# Altium PCB LineFollower.PcbDoc
Units mm, origin at the board's own origin, x right, y up, seen from the top; angles counter-clockwise.
Board outline 60 x 102.04 mm, 2 copper layers (Top Layer, Bottom Layer), stack 1.271 mm thick; 37 components, 52 nets, 179 pads, 44 vias.
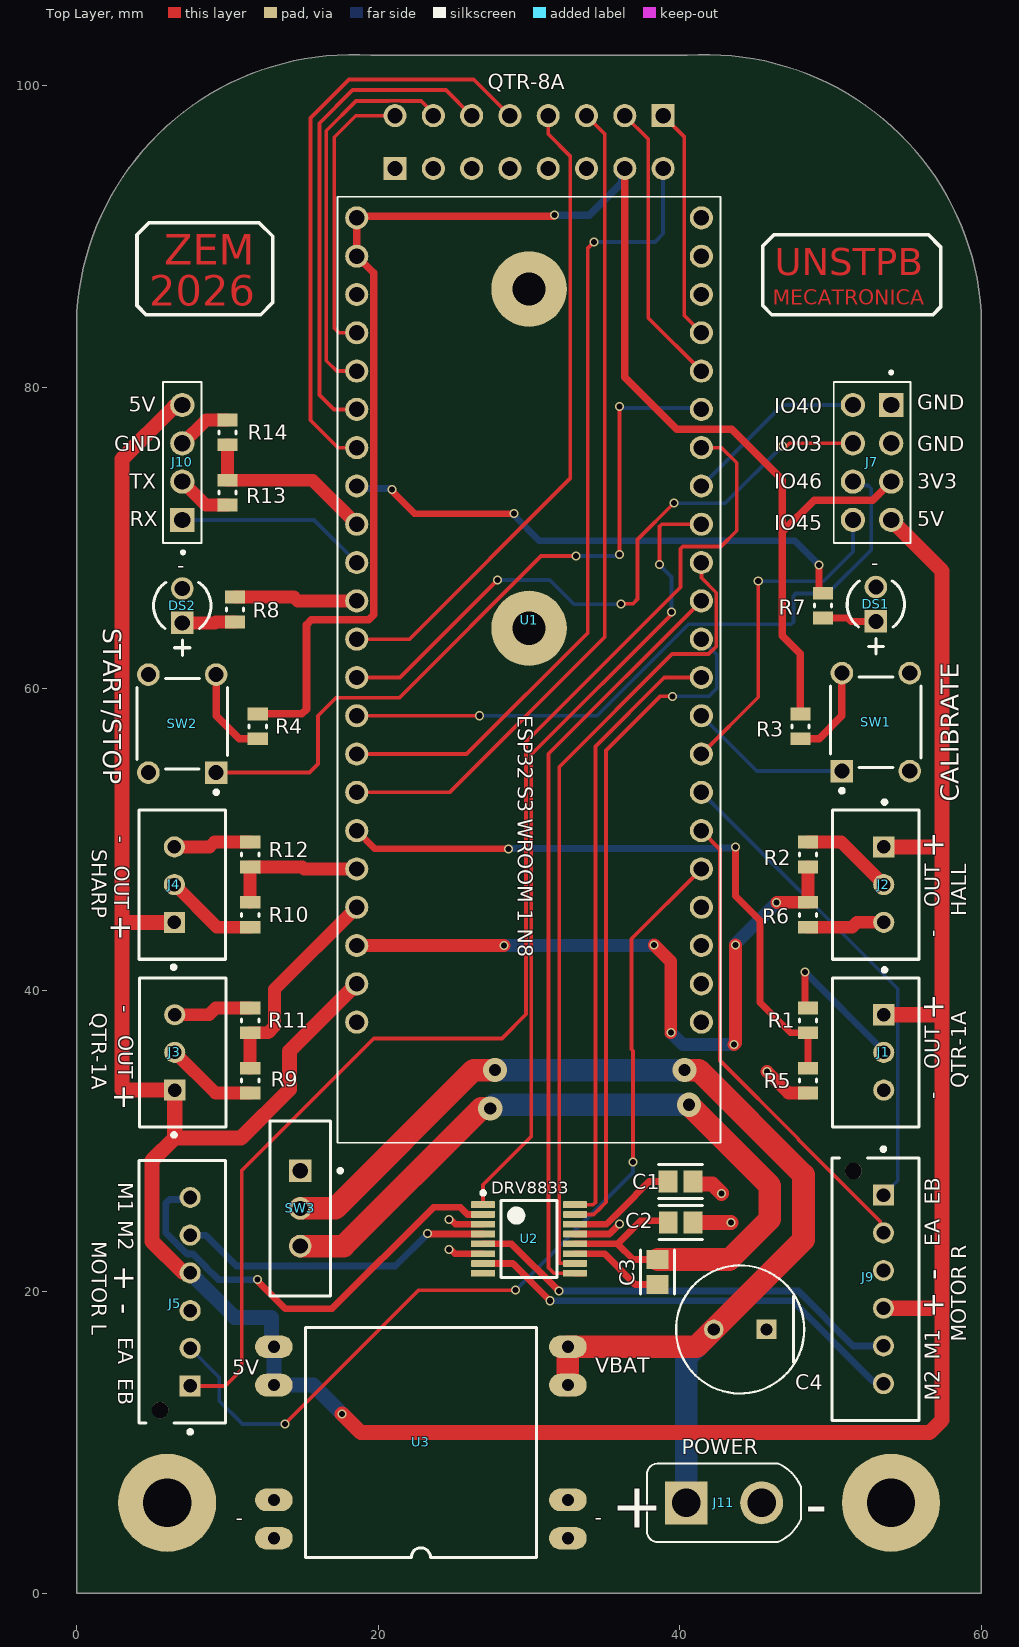
[diagram p0: Top Layer view]
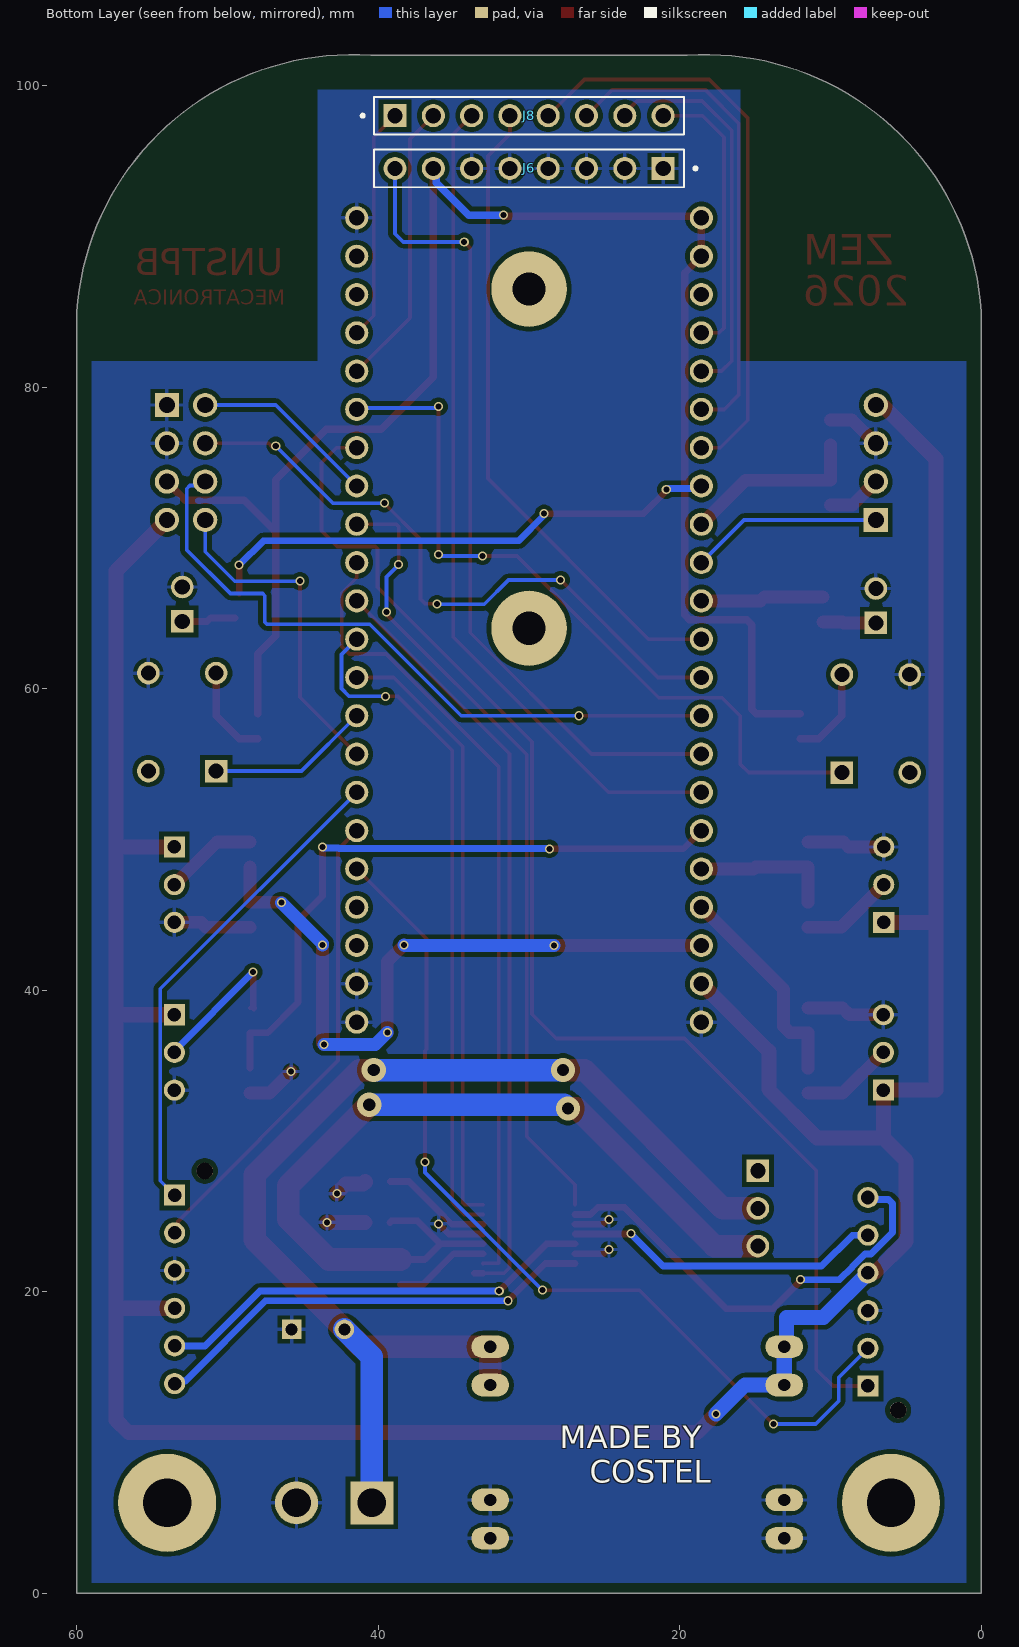
[diagram p1: Bottom Layer view, seen from below]

## Layer stack, top to bottom
Top Solder: solder mask 0.0102, Solder Resist, Dk 3.5
Top Layer: signal copper 0.0356
Dielectric 1: dielectric 1.2, FR-4, Dk 4.8
Bottom Layer: signal copper 0.0356
Bottom Solder: solder mask 0.0102, Solder Resist, Dk 3.5

## Board outline
0,0 0,85 cw(c18.25,83.75) 19.5,102 40.5,102 cw(c41.75,83.75) 60,85 60,0

## Design rules (kind name [scope] priority, off if disabled: settings)
Clearance Clearance_1 [InNamedPolygon('GND_L02_P001')] p1: gap=0.3 ignorepadtopadclearanceinfootprint=FALSE
Clearance [All] p2: gap=0.1 ignorepadtopadclearanceinfootprint=TRUE
HoleSize [All] p1: absolutevalues=TRUE maxlimit=6.5 minlimit=0.025 maxpercent=80.000 minpercent=20.000
MinimumSolderMaskSliver [All] p1: minsoldermaskwidth=0.05
PolygonConnect [All] p1: connectstyle=Relief reliefconductorwidth=0.254 reliefentries=4 polygonreliefangle="90 Angle" airgapwidth=0.254
RoutingVias [All] p1: holewidth=0.4 width=0.8 viastyle="Through Hole" minholewidth=0.2 minwidth=0.6 maxholewidth=0.8 maxwidth=0.8
SilkToSilkClearance [All] p1: silktosilkclearance=0.05
SilkToSolderMaskClearance [IsPad] p1: minsilkscreentomaskgap=0.05 clearancetoexposedcopper=TRUE
SolderMaskExpansion [All] p1: expansion=0.102 istentingtop=FALSE
SupplyNets "Schematic Supply Nets_3" [InNet('3V3')] p1: voltage=0.000
SupplyNets "Schematic Supply Nets_2" [InNet('GND')] p2: voltage=0.000
SupplyNets "Schematic Supply Nets_1" [InNet('VBAT')] p3: voltage=0.000
SupplyNets "Schematic Supply Nets" [InNet('VCC')] p4: voltage=0.000
Width VBAT [InNet('VBAT')] p1: maxlimit=2 minlimit=0.3 preferedwidth=2
Width GND [InNet('GND')] p2: maxlimit=2 minlimit=0.3 preferedwidth=2
Width 3V3 [InNet('3V3')] p3: maxlimit=0.5 minlimit=0.5 preferedwidth=0.5
Width VCC [InNet('GND')] p4: maxlimit=1 minlimit=0.8 preferedwidth=1
Width [All] p5: maxlimit=1.5 minlimit=0.2 preferedwidth=0.25
26 further rules are at their usual default settings.

## Components (designator, comment, footprint, x,y, rotation, side; value= is the part's Value field where it differs from the comment)
C1 "2.2uF 10V" FP-CL21-IPC_B 40.039,27.308 r0 top
C2 "10uF 25V" FP-CL21-IPC_B 40.055,24.598 r180 top
C3 "0.01uF 25V" FP-CL21-IPC_B 38.53,21.312 r90 top
C4 "EEUTA1E101" FP-RAD-TH-D_8_0_5-L_11_5-MFG 44,17.5 r180 top
DS1 "304090040" LED-2P-2.28-3MM 53,65.598 r90 top
DS2 "304090040" LED-2P-2.28-3MM 7,65.5 r90 top
J1 "B3B-XH-A" FP-B3B-XH-A_LF_SN-MFG 53,35.871 r270 top
J2 "B3B-XH-A" FP-B3B-XH-A_LF_SN-MFG 53,47 r270 top
J3 "B3B-XH-A" FP-B3B-XH-A_LF_SN-MFG 7.025,35.871 r90 top
J4 "B3B-XH-A" FP-B3B-XH-A_LF_SN-MFG 7,47 r90 top
J5 "B6B-XH-AM" FP-B6B-XH-AM_LF_SN-MFG#1 7,20 r270 top
J6 "HEADER 8PIN 2.54" GRAVITECH_8FX1-254MM 30,94.5 r0 bottom
J7 "HEADER 8PIN 2.54" SULLINS_PPPC042LFBN-RC 52.75,75 r90 top
J8 "HEADER 8PIN 2.54" GRAVITECH_8FX1-254MM 30,98 r180 bottom
J9 "B6B-XH-AM" FP-B6B-XH-AM_LF_SN-MFG#2 52.981,20.155 r90 top
J10 "HEADER 4PIN 2.54" SULLINS_PPTC041LFBN-RC 7,75 r90 top
J11 "XT30UPB-M" AMASS_XT30UPB-M 37.591,3.206 r0 top
R1 "1KR" RESC2013X60X30LL20T20 48.5,38 r90 top
R2 "1KR" RESC2013X60X30LL20T20 48.5,49 r90 top
R3 "10KR" RESC2013X60X30LL20T20 48,57.5 r90 top
R4 "10KR" RESC2013X60X30LL20T20 12,57.5 r90 top
R5 "2KR" RESC2013X60X30LL20T20 48.5,34 r90 top
R6 "2KR" RESC2013X60X30LL20T20 48.5,45 r90 top
R7 "330R" RESC2013X60X30LL20T20 49.5,65.5 r90 top
R8 "330R" RESC2013X60X30LL20T20 10.5,65.25 r90 top
R9 "1KR" RESC2013X60X30LL20T20 11.5,34 r270 top
R10 "1KR" RESC2013X60X30LL20T20 11.5,45 r270 top
R11 "2KR" RESC2013X60X30LL20T20 11.5,38 r270 top
R12 "2KR" RESC2013X60X30LL20T20 11.5,49 r270 top
R13 "1KR" RESC2013X60X30LL20T20 10,73 r270 top
R14 "2KR" RESC2013X60X30LL20T20 10,77 r270 top
SW1 "B3F-1000" OMRON-B3F-1000-4_V#1 53,57.779 r90 top
SW2 "B3F-1000" OMRON-B3F-1000-4_V#2 7,57.681 r90 top
SW3 "EG1218" ESWI-EG1218_V 14.825,25.525 r270 top
U1 "ESP32-S3-DEVKITC-1U-N8" MODULE_ESP32-S3-DEVKITC-1U-N8R8 30,61.25 r0 top locked
U2 "DRV8833PW" PW0016A_M 30,23.5 r0 top
U3 "MP1584" MP1584 32.575,3.65 r180 top

## Footprints (in the part's own frame and the unit in brackets; to place one, negate y for a bottom-side part, rotate by r counter-clockwise, add the part's x,y. Pads: shape width x height; smd on the part's side, far side on the other; paste and mask are expansions set on the pad)
AMASS_XT30UPB-M [mm]
  round 2.85 hole 1.9 mask+0.102: N(7.834,2.794)
  rect 2.85x2.85 / inner round 2.85 / far side rect 2.85x2.85 hole 1.9 mask+0.102: P(2.834,2.794)
  silkscreen extent 0.23,0.19 10.44,5.4, body extent 0.23,0.19 10.43,5.39, height 10.7
ESWI-EG1218_V [mm] "THD, 3-Leads, Body 11.6x4mm, Pitch 2.5mm"
  rect 1.5x1.5 hole 1: 1(-2.5,0)
  round 1.5 hole 1: 2(0,0) 3(2.5,0)
  silkscreen extent -5.8,-2 5.8,2.78, body extent -5.8,-2 5.8,2, height 7.4
FP-B3B-XH-A_LF_SN-MFG [mm]
  rect 1.4x1.4 hole 0.9 paste-2539.97 mask+0: 1(-2.5,0.525)
  round 1.4 hole 0.9 paste-2539.97 mask+0: 2(0,0.525) 3(2.5,0.525)
  silkscreen extent -5.6,-2.87 4.95,2.88, body extent -5.05,-2.98 5.05,2.98, height 0.25
FP-B6B-XH-AM_LF_SN-MFG#1 [mm]
  rect 1.4x1.4 hole 0.9 paste-2539.97 mask+0: 1(6.25,0.525)
  round 1.4 hole 0.9 paste-2539.97 mask+0: 2(3.75,0.525) 3(1.25,0.525) 4(-1.25,0.525) 5(-3.75,0.525) 6(-6.25,0.525)
  round 1.1 hole 1.1 unplated paste-2539.97 mask+0: ""(7.85,-1.475)
  silkscreen extent -8.7,-2.87 9.42,2.88, body extent -8.7,-2.88 8.7,2.88, height 7
FP-B6B-XH-AM_LF_SN-MFG#2 [mm]
  rect 1.4x1.4 hole 0.9 paste-2539.97 mask+0: 1(6.25,-0.525)
  round 1.4 hole 0.9 paste-2539.97 mask+0: 2(3.75,-0.525) 3(1.25,-0.525) 4(-1.25,-0.525) 5(-3.75,-0.525) 6(-6.25,-0.525)
  round 1.1 hole 1.1 unplated paste-2539.97 mask+0: ""(7.85,1.475)
  silkscreen extent -8.7,-2.87 9.42,2.88, body extent -8.7,-2.88 8.7,2.88, height 7
FP-CL21-IPC_B [mm]
  rect 1.255x1.456 smd paste+0 mask+0: 1(-0.826,0) 2(0.826,0)
  silkscreen extent -1.45,-1.13 1.45,1.13, body extent -1.7,-0.98 1.7,0.98, height 0.25
FP-RAD-TH-D_8_0_5-L_11_5-MFG [mm]
  rect 1.3x1.3 hole 0.8 paste-2539.97 mask+0: 1(-1.75,0)
  round 1.3 hole 0.8 paste-2539.97 mask+0: 2(1.75,0)
  silkscreen extent -4.25,-4.25 4.25,4.25, body extent -4.35,-4.35 4.35,4.35, height 0.25
GRAVITECH_8FX1-254MM [mm]
  rect 1.53x1.53 hole 1.02: 1(-8.89,0)
  round 1.53 hole 1.02: 2(-6.35,0) 3(-3.81,0) 4(-1.27,0) 5(1.27,0) 6(3.81,0) 7(6.35,0) 8(8.89,0)
  silkscreen extent -11.13,-1.25 10.29,1.25, body extent -10.29,-1.25 10.29,1.25, height 8.65
LED-2P-2.28-3MM [mm] "LED, 2-Leads, Dia 3mm, Pitch 2.28mm"
  rect 1.5x1.5 hole 1: 1(-1.14,0)
  round 1.5 hole 1: 2(1.14,0)
  silkscreen extent -3.29,-1.9 1.52,1.9, body extent -1.9,-1.91 1.52,1.91, height 5.3
MODULE_ESP32-S3-DEVKITC-1U-N8R8 [mm]
  round 1.53 hole 1.02 mask+0.102: J1_1(-11.43,29.97) J1_2(-11.43,27.43) J1_3(-11.43,24.89) J1_4(-11.43,22.35) J1_5(-11.43,19.81) J1_6(-11.43,17.27) J1_7(-11.43,14.73) J1_8(-11.43,12.19) J1_9(-11.43,9.65) J1_10(-11.43,7.11) J1_11(-11.43,4.57) J1_12(-11.43,2.03) J1_13(-11.43,-0.51) J1_14(-11.43,-3.05) J1_15(-11.43,-5.59) J1_16(-11.43,-8.13) J1_17(-11.43,-10.67) J1_18(-11.43,-13.21) J1_19(-11.43,-15.75) J1_20(-11.43,-18.29) J1_21(-11.43,-20.83) J1_22(-11.43,-23.37) J3_1(11.43,29.97) J3_2(11.43,27.43) J3_3(11.43,24.89) J3_4(11.43,22.35) J3_5(11.43,19.81) J3_6(11.43,17.27) J3_7(11.43,14.73) J3_8(11.43,12.19) J3_9(11.43,9.65) J3_10(11.43,7.11) J3_11(11.43,4.57) J3_12(11.43,2.03) J3_13(11.43,-0.51) J3_14(11.43,-3.05) J3_15(11.43,-5.59) J3_16(11.43,-8.13) J3_17(11.43,-10.67) J3_18(11.43,-13.21) J3_19(11.43,-15.75) J3_20(11.43,-18.29) J3_21(11.43,-20.83) J3_22(11.43,-23.37)
  silkscreen extent -12.7,-31.37 12.7,31.37, body extent -12.7,-31.96 12.7,31.37, height 7.49
MP1584 [mm]
  oval 2.5x1.5 hole 0.8: 1(0,0) 2(0,-2.54) 5(0,-10.16) 6(0,-12.7) 7(19.5,-12.7) 8(19.5,-10.16) 11(19.5,-2.54) 12(19.5,0)
  silkscreen extent 2.08,-13.97 17.42,1.27
OMRON-B3F-1000-4_V#1 [mm] "TH, 4-Leads, Body 6x6mm"
  rect 1.5x1.5 hole 1 paste-2539.97: 1(-3.25,2.25)
  round 1.5 hole 1 paste-2539.97: 2(3.25,2.25) 4(3.25,-2.25)
  round 1.5 hole 1 paste-2539.97 mask+0.102: 3(-3.25,-2.25)
  silkscreen extent -4.67,-3 3,3, body extent -3.4,-3 3.4,3, height 4.5
OMRON-B3F-1000-4_V#2 [mm] "TH, 4-Leads, Body 6x6mm"
  rect 1.5x1.5 hole 1 paste-2539.97: 1(-3.25,-2.25)
  round 1.5 hole 1 paste-2539.97: 2(3.25,-2.25) 4(3.25,2.25)
  round 1.5 hole 1 paste-2539.97 mask+0.102: 3(-3.25,2.25)
  silkscreen extent -4.67,-3 3,3, body extent -3.4,-3 3.4,3, height 4.5
PW0016A_M [mm] "SOP, 16-Leads, Body 5.1x4.5mm, Pitch 0.65mm, IPC Low Density"
  rrect22% 1.6x0.45 smd: 1(-3.05,2.275) 2(-3.05,1.625) 3(-3.05,0.975) 4(-3.05,0.325) 5(-3.05,-0.325) 6(-3.05,-0.975) 7(-3.05,-1.625) 8(-3.05,-2.275) 9(3.05,-2.275) 10(3.05,-1.625) 11(3.05,-0.975) 12(3.05,-0.325) 13(3.05,0.325) 14(3.05,0.975) 15(3.05,1.625) 16(3.05,2.275)
  silkscreen extent -3.17,-2.55 1.85,3.17, body extent -3.21,-2.5 3.21,2.5, height 1
RESC2013X60X30LL20T20 [mm] "Chip Resistor, 2-Leads, Body 2.00x1.25mm, IPC High Density"
  rect 0.85x1.35 smd: 1(-0.825,0) 2(0.825,0)
  silkscreen extent -0.1,-0.58 0.1,0.57, body extent -1.1,-0.72 1.1,0.72, height 0.6
SULLINS_PPPC042LFBN-RC [mm]
  rect 1.605x1.605 / inner round 1.605 / far side rect 1.605x1.605 hole 1.07: 1(3.81,-1.27)
  round 1.605 hole 1.07: 2(3.81,1.27) 3(1.27,-1.27) 4(1.27,1.27) 5(-1.27,-1.27) 6(-1.27,1.27) 7(-3.81,-1.27) 8(-3.81,1.27)
  silkscreen extent -5.33,-2.54 6.07,2.54, body extent -5.33,-2.54 5.33,2.54, height 8.51
SULLINS_PPTC041LFBN-RC [mm]
  rect 1.605x1.605 / inner round 1.605 / far side rect 1.605x1.605 hole 1.07: 1(-3.81,0)
  round 1.605 hole 1.07: 2(-1.27,0) 3(1.27,0) 4(3.81,0)
  silkscreen extent -6.06,-1.27 5.33,1.27, body extent -5.33,-1.27 5.33,1.27, height 8.51

## Part data
C1 C2 C3: library part CMP-13271-004554-1, "CL21 Series 0805 10uF 25V ±20% Tolerance X5R Multilayer Ceramic Chip Capacitor", RoHS Compliant=Yes
C4: library part CMP-05427-002094-1, "Aluminum Electrolytic Capacitors (Radial Lead Type) AEC-Q200 Qualified 100uF ±20% 25V", Capacitance=100uF, Case/Package=Radial, Dielectric Material=Aluminium, ESR (Equivalent Series Resistance)=130mR, Leakage Current=25uA, Max Operating Temperature=125°C, Min Operating Temperature=-40°C, Package Quantity=200, Ripple Current=500mA, Tolerance=20%, Voltage=25V, Construction=RADIAL, Contact Plating=Tin, Diameter=8mm, Height=11.5mm, Height - Seated (Max)=0.492inch, Impedance=130mR, Lead Diameter=0.6mm, Lead Length=17mm, Lead Pitch=3.5mm, Length=11.5mm, Life (Hours)=2000Hour, Mount="Through Hole", Number of Pins=2, Packaging=Bulk, Polarity=Polar, Radiation Hardening=No, RoHS Compliant=Yes, Series=TA, Termination=Radial, Voltage Rating=25V, Voltage Rating (DC)=25V
DS1 DS2: library part CMP-007-00006-2, "Green LED, 80 mW, 20 mA, -25 to 85 degC, 2-Pin THD", Manufacturer="Shenzhen CGX", Package Description="2-Pin Through Hole Device, Dia 3 mm, Pitch 2.28 mm", Case/Package=304090040, Datasheet URL=http://datasheet.octopart.com/304090040-Chengguangxing-datasheet-62330655.pdf, Datasheet Version="Rev. 1.0, 09/2014", Manufacturer URL=http://szcgx.com/, Mounting Technology=TH, Package Reference=304090040, RoHS Compliant=Unknown
J1 J2 J3 J4: library part CMP-17439-000014-3, "CONN HEADER VERT 3POS 2.5MM", Color=Natural, Contact Resistance=20mR, Current Rating=3A, Flammability Rating="UL94 V-0", Housing Color=White, Insulation Resistance=1GR, Max Operating Temperature=85°C, Max Voltage Rating (AC)=250V, Min Operating Temperature=-25°C, Connector Type=Header, Contact Finish - Mating=TIN, Contact Material=Brass, Contact Plating=Tin, Contact Shape=Square, Contact Type="Male Pin", Depth=5.75mm, Fastening Type=Detent, Gender=Male, Housing Material=Polyamide, Insulation Color=Natural, Insulation Material=Nylon, Lead Free="Lead Free", Lead Pitch=2.5mm, Length=9.9mm, Max Current Rating=3A, Max Voltage Rating (DC)=250V, Mount="Through Hole", Number of Contacts=3, Number of Positions=3, Number of Rows=1, Orientation=Straight, Packaging=Bulk, Pitch=2.5mm, REACH SVHC="No SVHC", Series=XH, Termination=Solder, Voltage Rating=250V, Voltage Rating (AC)=250V, Wire/Cable Gauge=22AWG
J5 J9: library part CMP-17439-000167-1, "CONN HEADER VERT 6POS 2.5MM", Current Rating=3A, Flammability Rating="UL94 V-0", Insulation Color=Natural, Max Operating Temperature=85°C, Min Operating Temperature=-25°C, Voltage Rating=250V, Connector Type=Header, Contact Finish - Mating=TIN, Contact Material=Brass, Contact Plating=Copper, Contact Shape=Square, Contact Type="Male Pin", Fastening Type=Detent, Height=7mm, Insulation Material=Nylon, Length=17.4mm, Mated Stacking Heights=9.8mm, Mount="Through Hole", Number of Pins=6, Number of Poles=6, Number of Positions=6, Number of Rows=1, Packaging=Bulk, Pitch=2.5mm, Series=XH, Shape=Straight, Termination=Press-Fit, Width=5.75mm
J6 J8: library part 8FX1-254MM, "Headers & Wire Housings 2.54MM 0.1 8-PIN FEMALE HEADER", Package=None, Availability="In Stock", Check_prices=https://www.snapeda.com/parts/8Fx1-254mm/Gravitech/view-part/?ref=eda, MF=Gravitech, MP=8Fx1-254mm, Price=None, Purchase-URL=https://pricing.snapeda.com/search/part/8Fx1-254mm/?ref=eda, SnapEDA_Link=https://www.snapeda.com/parts/8Fx1-254mm/Gravitech/view-part/?ref=snap
J7: library part PPPC042LFBN-RC, "8 Position Total Dual Row 2.54 mm Pitch Straight Female Header", Package=None, Check_prices=https://www.snapeda.com/parts/PPPC042LFBNRC/Sullins/view-part/?ref=eda, MF="Sullins Connector Solutions", MP=PPPC042LFBNRC, SnapEDA_Link=https://www.snapeda.com/parts/PPPC042LFBNRC/Sullins/view-part/?ref=snap
J10: library part PPTC041LFBN-RC, "4 Position Header Connector 0.100 (2.54mm) Through Hole Tin", Package=None, Check_prices=https://www.snapeda.com/parts/PPTC041LFBN-RC/Sullins/view-part/?ref=eda, MF="Sullins Connector", MP=PPTC041LFBN-RC, SnapEDA_Link=https://www.snapeda.com/parts/PPTC041LFBN-RC/Sullins/view-part/?ref=snap
J11: "Socket; DC supply; XT30; male; PIN: 2; on PCBs; THT; yellow; 15A; 500V", Package=None, Check_prices=https://www.snapeda.com/parts/XT30UPB-M/AMASS/view-part/?ref=eda, MF=amass, MP=XT30UPB-M, SnapEDA_Link=https://www.snapeda.com/parts/XT30UPB-M/AMASS/view-part/?ref=snap
R1 R2 R3 R4 R5 R6 R7 R8 R9 R10 R11 R12 R13 R14: library part CMP-2001-02616-1, Manufacturer="KOA Speer", Part Number=SG73S2ATTD1002F
SW1 SW2: library part CMP-011-00004-2, "Tactile Switch, SPST-NO, 0.05 A, 24 V, -25 to 70 degC, 4-Pin THD, RoHS, Bulk", Contact Current Rating=50mA, Manufacturer="Omron Electronic Components", Max Contact Resistance=100mohm, Max Operating Temperature=70°C, Max Voltage Rating (DC)=24V, Min Operating Temperature=-25°C, Operating Force=100gf, Package Description="4-Pin Through Hole Device, Body 6 x 6 mm", Package Quantity=1500, Resistance=0.1Ohm, Case/Package=B3F-1000, Contact Material=Gold, Contact Plating=Gold, Current Rating=50mA, Datasheet URL=http://www.omron.com/ecb/products/pdf/en-b3f.pdf, Datasheet Version=Jan-15, Manufacturer URL=http://www.omron.com/, Max Current Rating=50mA, Mounting Technology=TH, Package Reference=B3F-1000, Packaging=Bulk, Pins=4, RoHS Compliant=True, Throw Configuration=SPST, Voltage Rating=24V, Voltage Rating (DC)=24V
SW3: library part CMP-1696-00002-1, "Slide Switch, 500 V, -20 to 70 degC, 3-Pin THD, RoHS", Case\Package=SOT-23-5, Dropout Voltage="300 mV", Max Input Voltage="8 V", Max Operating Temperature="85 degC", Max Ouput Current="150 mA", Max Power Dissipation="250 mW", Min Input Voltage="4.3 V", Min Operating Temperature="-40 degC", Nominal Output Voltage="3.3 V", Package Quantity=3000, ComponentLink1Description="Manufacturer URL", ComponentLink1URL=http://www.e-switch.ch/en/, ComponentLink2Description=Datasheet, ComponentLink2URL=https://www.e-switch.com/system/asset/product_line/data_sheet/119/EG.pdf, DatasheetVersion=Oct-15, Height="1.3 mm", Length="3 mm", Mount="Surface Mount", Output Current="150 mA", Output Voltage="3.3 V", Outputs=1, PackageDescription="3-Pin Through Hole Device, Body 11.6 x 4 mm, Pitch 2.5 mm", PackageReference=EG1218, Packaging="Tape and Reel", Pins=5, Power Rating="250 mW", Radiation Hardening=No, REACH SVHC="No SVHC", RoHSCompliant=true, Width="1.8 mm"
U1: library part ESP32-S3-DEVKITC-1U-N8R8, "The ESP32-S3-DEVKITC-1U-N8R8 from Espressif Systems is an evaluation board designed for wireless communication applications. It features a 32-bit Xtensa dual-core processor running at 240MHz, providing strong processing power for complex tasks. The board", Package=None, Check_prices=https://www.snapeda.com/parts/ESP32-S3-DEVKITC-1U-N8R8/Espressif+Systems/view-part/?ref=eda, MF="Espressif Systems", MP=ESP32-S3-DEVKITC-1U-N8R8, SnapEDA_Link=https://www.snapeda.com/parts/ESP32-S3-DEVKITC-1U-N8R8/Espressif+Systems/view-part/?ref=snap
U2: library part CMP-1529-00002-2, "2 A Low Voltage Dual Brushed DC or Single Bipolar Stepper Motor Driver (PWM Ctrl), 2.7 to 10.8 V, -40 to 85 degC, 16-Pin SOP (PW), Green (RoHS & no Sb/Br), Tube", Manufacturer="Texas Instruments", Package Reference=PW0016A, Peak Output Current="2 A", RMS Output Current="1.5 A", Temperature Range="-40 to 85 degC", ComponentLink1Description="Manufacturer URL", ComponentLink1URL=www.ti.com, ComponentLink2Description=Datasheet, ComponentLink2URL=http://www.ti.com/lit/ds/symlink/drv8833.pdf, ComponentLink3Description="Package Specification", ComponentLink3URL=http://www.ti.com/lit/ml/mpds361/mpds361.pdf, Control I/F=PWM, DatasheetVersion=SLVSAR1D, Eco-Plan="Green (RoHS & no Sb/Br)", Mounting Technology="Surface Mount", PackageDescription="16-Pin Plastic Small Outline, Body 4.4 x 5 mm, Pitch 0.65 mm", PackageVersion=4040064-4/G, Packing=Tube, PartNumber=DRV8833PW, rDS (ON) (LS + HS)="360 mOhms", Vs="2.7 V Min."

## Free pads (board coordinates)
  round 5 hole 2.2: 5(30,86.5) 6(30,64)
  round 6.5 hole 3.2: 7(6,6) 7(54,6)

## Via types
v1: diameter 0.6, hole 0.4, Top Layer to Bottom Layer, 40 vias
v2: diameter 1.6, hole 0.8, Top Layer to Bottom Layer, 4 vias

## Nets (pads, with @x,y where several pads share a name; then routed paths per layer and width w, separated by ;. In a path a pad name is that pad's centre, name@x,y a point inside that pad or via, vN(x,y) a via of type N, cw(c..) or ccw(c..) an arc to the next point about the centre after c; other vN are vias at no path point)
3V3: J6.7 J7.5 R3.2 R4.2 U1.J1_1 U1.J1_2 | length 111.8
  Top Layer w0.5: R4.2 14.922,58.325 15.24,58.643 15.24,64.249 15.557,64.567 19.367,64.567 19.685,64.884 19.685,87.565 U1.J1_2 U1.J1_1 18.693,91.343 31.643,91.343 v1(31.7,91.4) ; J6.7 36.35,80.65 39.8,77.2 43.45,77.2 46.8,73.85 46.8,70.4 ; R3.2 48,62.3 46.8,63.5 46.8,70.4 ; J7.5 52.79,72.5 48.9,72.5 46.8,70.4
  Bottom Layer w0.5: v1(31.7,91.4) 34,91.4 36.154,93.554 36.154,94.304 J6.7
GND: C1.2 C2.1 C4.1 DS1.2 DS2.2 J1.3 J2.3 J3.3 J4.3 J5.3 J6.1 J6.2 J6.3 J6.4 J6.5 J6.6 J7.1 J7.3 J9.3 J10.3 J11.N R5.1 R6.1 R11.1 R12.1 R14.1 SW1.4 SW2.4 U1.J1_22 U1.J3_1 U1.J3_21 U1.J3_22 U2.3 U2.6 U2.13 U3.1 U3.2 U3.11 U3.12 | length 35.2
  Top Layer w0.45: v1(24.7,22.8) 24.795,22.8 25.07,22.525 U2.6 ; v1(24.7,24.8) 24.795,24.8 25.12,24.475 U2.3 ; U2.13 35.325,23.825 v1(36,24.5)
  Top Layer w0.85: J4.3 8.814,49.5 9.139,49.825 R12.1 ; J3.3 8.763,38.371 9.217,38.825 R11.1 ; J10.3@7.028,76.27 8.583,77.825 R14.1 ; v1(45.775,34.6) 47.2,33.175 R5.1 ; R6.1 51.425,44.175 51.75,44.5 J2.3
  Top Layer w1: C1.2 40.865,27.258 40.992,27.131 42.164,27.131 42.75,26.545 v1(42.75,26.5) ; C2.1 43.398,24.598 v1(43.4,24.6)
  Top Layer w1.5: J10.3 J10.3@7.028,76.27
IO0: SW1.1 U1.J3_14 | length 10.8
  Bottom Layer w0.25: U1.J3_14 45.101,54.529 SW1.1
IO1: J8.1 U1.J3_4 | length 15.5
  Top Layer w0.25: J8.1 40.3,96.59 40.3,84.73 U1.J3_4
IO2: J8.2 U1.J3_5 | length 19
  Top Layer w0.25: J8.2 37.9,96.45 37.9,84.59 U1.J3_5
IO3: J7.4 U1.J1_13 | length 43
  Top Layer w0.25: U1.J1_13 21.44,60.74 v1(27.9,67.2) ; v1(36.1,65.6) 36.121,65.621 36.875,65.621 37.2,65.946 37.2,69.9 v1(39.6,72.3) ; v1(46.8,76.1) 46.846,76.054 47.054,76.054 47.27,76.27 J7.4
  Bottom Layer w0.25: v1(27.9,67.2) 31.374,67.2 32.974,65.6 v1(36.1,65.6) ; v1(39.6,72.3) 43,72.3 v1(46.8,76.1)
IO4: J8.3 U1.J1_16 | length 55.8
  Top Layer w0.25: U1.J1_16 24.72,53.12 35.025,63.425 35.025,96.785 J8.3
IO5: J8.4 U1.J1_12 | length 43.2
  Top Layer w0.25: U1.J1_12 22.07,63.28 32.725,73.935 32.725,95.325 31.27,96.78 J8.4
IO6: J8.5 U1.J1_7 | length 39.2
  Top Layer w0.25: U1.J1_7 17.32,75.98 15.5,77.8 15.5,97.85 18.05,100.4 26.33,100.4 J8.5
IO7: J8.6 U1.J1_6 | length 32.6
  Top Layer w0.25: U1.J1_6 17.055,78.52 16.1,79.475 16.1,97.5 18.3,99.7 24.49,99.7 J8.6
IO8: J8.7 U1.J1_5 | length 26
  Top Layer w0.25: U1.J1_5 17.24,81.06 16.55,81.75 16.55,97 18.525,98.975 20.685,98.975 20.7,98.99 21.52,98.99 21.535,98.975 22.85,98.975 23.65,98.175 J8.7
IO9: J8.8 U1.J1_4 | length 18.9
  Top Layer w0.25: U1.J1_4 17.4,83.6 17.075,83.925 17.075,96.575 18.5,98 J8.8
IO10: J6.8 U1.J1_15 | length 53.9
  Top Layer w0.25: U1.J1_15 25.86,55.66 33.9,63.7 33.9,89.225 v1(34.3,89.625)
  Bottom Layer w0.25: v1(34.3,89.625) 38.35,89.625 38.89,90.165 J6.8
IO11: R1.1 R5.2 U1.J1_17 | length 43
  Top Layer w0.45: U1.J1_17 19.775,49.375 v1(28.65,49.375) ; v1(43.7,49.5) 43.7,46.242 45.325,44.617 45.325,39.175 47.325,37.175 R1.1 R5.2
  Bottom Layer w0.45: v1(28.65,49.375) 28.675,49.4 42.605,49.4 42.638,49.433 43.633,49.433 v1(43.7,49.5)
IO12: R10.1 R12.2 U1.J1_18 | length 9.5
  Top Layer w0.85: R10.1 R12.2 14.961,48.175 15.096,48.04 U1.J1_18
IO13: R9.1 R11.2 U1.J1_19 | length 14.3
  Top Layer w0.85: R9.1 11.5,35.992 R11.2 12.7,37.175 13.126,37.601 13.126,40.056 U1.J1_19
IO14: R2.1 R6.2 U1.J1_20 | length 45.5
  Top Layer w0.85: U1.J1_20 v1(28.34,42.96) ; v1(38.3,43) 39.4,41.9 v1(39.4,37.2) ; v1(43.6,36.4) 43.7,36.5 v1(43.7,43) ; v1(46.425,45.8) 46.45,45.825 R6.2 R2.1
  Bottom Layer w0.85: v1(28.34,42.96) 38.26,42.96 v1(38.3,43) ; v1(39.4,37.2) 40.2,36.4 v1(43.6,36.4) ; v1(43.7,43) 43.7,43.075 v1(46.425,45.8)
IO15: R7.2 U1.J1_8 | length 35.1
  Top Layer w0.25: R7.2@49.225,66.325 R7.2
  Top Layer w0.45: v1(20.9,73.2) 20.9,73.1 22.4,71.6 v1(29,71.6) ; R7.2@49.225,66.325 v1(49.225,68.199)
  Bottom Layer w0.45: U1.J1_8 18.743,73.267 20.833,73.267 v1(20.9,73.2) ; v1(29,71.6) 29,71.5 30.7,69.8 47.624,69.8 v1(49.225,68.199)
IO16: R13.1 R14.2 U1.J1_9 | length 12.1
  Top Layer w0.85: R14.2 10,74.981 R13.1 15.645,73.825 U1.J1_9
IO17: J10.1 U1.J1_10 | length 12.7
  Bottom Layer w0.25: J10.1 15.74,71.19 U1.J1_10
IO18: R8.2 U1.J1_11 | length 8.2
  Top Layer w0.85: R8.2 14.402,66.075 14.657,65.82 U1.J1_11
IO21: J5.2 U1.J3_18 | length 61.4
  Top Layer w0.25: v1(13.8,11.225) 22.675,20.1 v1(29.1,20.1) ; v1(36.9,28.6) 36.9,35.975 36.8,36.075 36.8,43.41 U1.J3_18
  Bottom Layer w0.25: J5.2 9.458,14.317 9.458,12.758 10.991,11.225 v1(13.8,11.225) ; v1(29.1,20.1) 36.9,27.9 v1(36.9,28.6)
IO40: J7.2 U1.J3_8 | length 12.3
  Bottom Layer w0.25: U1.J3_8 46.8,78.81 J7.2
IO41: J5.1 U1.J3_7 | length 86.8
  Top Layer w0.25: J5.1 9.85,13.75 10.947,14.847 10.947,28.047 19.7,36.8 28.2,36.8 29.8,38.4 29.8,56.47 40.05,66.72 40.05,69.279 40.196,69.425 42.725,69.425 43.775,70.475 43.775,74.975 42.77,75.98 U1.J3_7
IO42: SW2.1 U1.J3_6 | length 49.9
  Top Layer w0.25: SW2.1 15.431,54.431 16,55 16,58.2 17.2,59.4 21.4,59.4 30.8,68.8 v1(33.1,68.8) ; v1(36,68.9) v1(36,78.7)
  Bottom Layer w0.25: v1(33.1,68.8) 35.9,68.8 v1(36,68.9) ; v1(36,78.7) 36.09,78.61 41.34,78.61 U1.J3_6
IO45: J7.8 U1.J3_15 | length 22.2
  Top Layer w0.25: U1.J3_15 45.2,59.43 v1(45.2,67.125)
  Bottom Layer w0.25: v1(45.2,67.125) 49.525,67.125 51.48,69.08 J7.8
IO46: J7.6 U1.J1_14 | length 45.2
  Top Layer w0.25: U1.J1_14 v1(26.7,58.2)
  Bottom Layer w0.25: v1(26.7,58.2) 34.5,58.2 40.57,64.27 47.384,64.27 47.53,64.416 47.53,66.154 47.676,66.3 49.8,66.3 52.7,69.2 52.7,73.254 52.483,73.471 51.739,73.471 J7.6
IO47: J9.2 U1.J3_17 | length 31.7
  Top Layer w0.25: U1.J3_17 42.672,49.338 42.672,45.669 42.672,35.328 47.85,30.15 47.85,30.1 53.286,24.664 53.286,24.125 J9.2
IO48: J9.1 U1.J3_16 | length 32.5
  Bottom Layer w0.25: U1.J3_16 54.458,40.092 54.458,27.357 J9.1
NetC1_1: C1.1 U2.14 | length 7.3
  Top Layer w0.45: U2.14 35.127,24.475 36.151,25.5 37.959,27.308 C1.1
NetC2_2: C2.2 C3.2 SW3.3 U2.12 | length 58
  Top Layer w0.45: U2.12 35.875,23.175 ; C3.2 36.912,22.138 35.875,23.175 ; C2.2 39.127,24.7 37.4,24.7 35.875,23.175
  Top Layer w1.5: SW3.3 17.7,23.025 26.825,32.15 v2(27.425,32.15) ; C3.2 43.288,22.138 45.975,24.825 45.975,27.025 v2(40.6,32.4)
  Bottom Layer w1.5: v2(27.425,32.15) 27.675,32.4 v2(40.6,32.4)
NetC3_1: C3.1 U2.11 | length 6.3
  Top Layer w0.45: U2.11 34.996,22.525 37.034,20.487 C3.1
NetDS1_1: DS1.1 R7.1 | length 3.6
  Top Layer w0.45: R7.1 51.13,64.675 51.347,64.458 DS1.1
NetDS2_1: DS2.1 R8.1 | length 3.5
  Top Layer w0.85: DS2.1 9.16,64.36 9.225,64.425 R8.1
NetJ1_2: J1.2 R1.2 | length 10.1
  Top Layer w0.25: R1.2@48.26,38.825 R1.2
  Top Layer w0.45: R1.2@48.26,38.825 48.3,38.865 v1(48.3,41.2)
  Bottom Layer w0.45: v1(48.3,41.2) 53.525,35.975 J1.2
NetJ2_2: J2.2 R2.2 | length 6.2
  Top Layer w0.85: R2.2 50.7,49.825 J2.2
NetJ3_2: J3.2 R9.2 | length 6.1
  Top Layer w0.85: J3.2 9.196,33.175 R9.2
NetJ4_2: J4.2 R10.2 | length 6.2
  Top Layer w0.85: J4.2 9.3,44.175 R10.2
NetJ5_5: J5.5 U2.4 | length 21.2
  Top Layer w0.25: U2.4@26.937,23.813 U2.4
  Top Layer w0.45: v1(23.25,23.85) 23.275,23.825 U2.4@26.937,23.825
  Bottom Layer w0.45: J5.5 7.535,23.74 8.56,23.74 10.6,21.7 21.125,21.7 23.25,23.825 v1(23.25,23.85)
NetJ5_6: J5.6 U2.2 | length 29.9
  Top Layer w0.45: v1(12,20.8) 12,20.7 13.823,18.877 16.942,18.877 23.665,25.6 25.446,25.6 25.921,25.125 U2.2
  Bottom Layer w0.45: J5.6 7.393,26.118 6.164,26.118 5.9,25.854 5.9,23.925 7.325,22.5 7.725,22.5 8.55,21.675 8.55,21.65 9.4,20.8 v1(12,20.8)
NetJ9_5: J9.5 U2.5 | length 29.4
  Top Layer w0.45: U2.5 28.844,23.175 v1(31.979,20.041)
  Bottom Layer w0.45: v1(31.979,20.041) 47.859,20.041 51.495,16.405 J9.5
NetJ9_6: J9.6 U2.7 | length 29.9
  Top Layer w0.45: U2.7 28.925,21.875 v1(31.4,19.4)
  Bottom Layer w0.45: v1(31.4,19.4) 47.475,19.4 52.788,14.087 53.324,14.087 J9.6
NetJ10_2: J10.2 R13.2 | length 3.6
  Top Layer w0.85: J10.2 8.555,72.175 R13.2
NetR3_1: R3.1 SW1.2 | length 6.2
  Top Layer w0.5: R3.1 49.233,56.675 50.75,58.192 SW1.2
NetR4_1: R4.1 SW2.2 | length 6.1
  Top Layer w0.5: SW2.2 9.25,58.212 10.787,56.675 R4.1
NetU1_J3_9: U1.J3_9 U2.1 | length 53.3
  Top Layer w0.25: U2.1 26.95,27.1 30.15,30.3 30.15,55.625 39.45,64.925 v1(39.45,65.075) ; v1(38.65,68.225) 38.65,70.754 38.796,70.9 U1.J3_9
  Bottom Layer w0.25: v1(38.65,68.225) 38.65,68.2 39.45,67.4 v1(39.45,65.075)
NetU1_J3_10: U1.J3_10 U2.10 | length 53.6
  Top Layer w0.25: U2.10 32.004,21.9 32.004,54.804 39.49,62.29 41.91,62.29 42.42,62.8 42.42,66.358 41.43,67.348 U1.J3_10
NetU1_J3_11: U1.J3_11 U2.9 | length 50.9
  Top Layer w0.25: U2.9 31.658,21.225 31.293,21.59 31.293,55.683 U1.J3_11
  Top Layer w0.45: U2.9 U2.9@33.625,21.225
NetU1_J3_12: U1.J3_12 U2.15 | length 45.1
  Top Layer w0.25: U2.15 34.29,25.125 34.59,25.425 34.599,25.425 34.95,25.776 34.95,25.785 35.1,25.935 35.1,55.9 38.687,59.487 v1(39.522,59.487)
  Bottom Layer w0.25: v1(39.522,59.487) 41.923,59.487 42.443,60.008 42.443,62.267 U1.J3_12
NetU1_J3_13: U1.J3_13 U2.16 | length 40.6
  Top Layer w0.25: U2.16 34.254,25.775 34.4,25.921 34.4,56.168 38.972,60.74 U1.J3_13
VBAT: C4.2 J11.P SW3.2 U3.5 U3.6 | length 77.7
  Top Layer w1.5: SW3.2 17.15,25.525 26.325,34.7 v2(27.75,34.7) ; U3.5 U3.6 41.1,16.35 C4.2 48.2,23.45 48.2,27.75 41.25,34.7 v2(40.3,34.7)
  Bottom Layer w1.5: v2(27.75,34.7) v2(40.3,34.7) ; J11.P 40.425,15.675 C4.2
VCC: J1.1 J2.1 J3.1 J4.1 J5.4 J7.7 J9.4 J10.4 U1.J1_21 U3.7 U3.8 | length 216.2
  Top Layer w1: J4.1 3.1,44.5 3,44.4 ; J10.4 6.884,78.694 6.463,78.694 3,75.231 3,44.4 ; J5.4 7.448,21.327 7.009,21.327 5,23.336 5,28.7 6.5,30.2 ; v1(17.6,11.9) 18.85,10.65 56.55,10.65 57.4,11.5 57.4,19 ; U1.J1_21 14.1,35.95 14.1,33.4 10.9,30.2 6.5,30.2 ; J9.4 57.305,18.905 57.4,19 ; J1.1 57.329,38.371 57.4,38.3 ; J2.1 57.2,49.5 57.4,49.7 ; J7.7 57.4,67.81 57.4,49.7 ; 3,44.4 3,33.371 J3.1 6.5,30.2 ; 57.4,19 57.4,38.3 ; 57.4,38.3 57.4,49.7
  Bottom Layer w1: J5.4 10.474,18.301 12.919,18.301 12.919,16.506 U3.7 U3.8 15.69,13.81 v1(17.6,11.9)
pads on no net: J5. J9. SW1.3 SW2.3 SW3.1 U1.J1_3 U1.J3_2 U1.J3_3 U1.J3_19 U1.J3_20 U2.8

## Polygon pours and split planes (outlines as drawn)
GND on Bottom Layer "GND_L02_P001" (solid, pour order 1): 1.009,0.708 59.009,0.708 59.009,81.708 44.009,81.708 44.009,99.708 16.009,99.708 16.009,81.708 1.009,81.708

## Other copper
Top Layer:
  text "ZEM" at 5.8,88.1 h2
  text "UNSTPB" at 46.3,87.4 h1.8
  text "MECATRONICA" at 46.179,85.454 h1
  text "2026" at 4.8,85.4 h2

## Silkscreen, mask and mechanical layers (free items; w line width, h text height)
Top Overlay:
  lines w0.254: 4,85.4 4,90.1 4.8,90.9 12.1,90.9 13,90 13,85.6 12.2,84.8 4.6,84.8 4,85.4 ; 45.5,85.4 46.1,84.8 56.8,84.8 57.3,85.3 57.3,89.3 56.5,90.1 46.25,90.1 45.5,89.35 45.5,85.4
  text "QTR-8A" at 27.254,99.754 h1
  text "GND" at 55.754,78.504 h1
  text "5V" at 3.454,78.379 h1
  text "IO40" at 46.254,78.254 h1
  text "GND" at 2.504,75.754 h1
  text "IO03" at 46.254,75.754 h1
  text "GND" at 55.754,75.754 h1
  text "TX" at 3.504,73.254 h1
  text "IO46" at 46.254,73.254 h1
  text "3V3" at 55.754,73.254 h1
  text "RX" at 3.504,70.754 h1
  text "5V" at 55.754,70.754 h1
  text "IO45" at 46.254,70.504 h1
  text "-" at 52.679,67.854 h1
  text "-" at 6.679,67.679 h1
  text "START/STOP" at 1.754,63.996 h1.2 r270
  text "ESP32 S3 WROOM 1 N8" at 29.254,58.246 h1 r270
  text "CALIBRATE" at 58.496,52.504 h1.2 r90
  text "-" at 2.504,50.246 h1 r270
  text "SHARP" at 0.996,49.333 h1 r270
  text "+" at 57.5,48.754 h1.52 r90
  text "OUT" at 2.504,48.246 h1 r270
  text "OUT" at 57.246,45.504 h1 r90
  text "+" at 2.25,44.996 h1.52 r270
  text "HALL" at 59.004,44.917 h1 r90
  text "-" at 57.246,43.504 h1 r90
  text "-" at 2.754,38.996 h1 r270
  text "QTR-1A" at 0.996,38.499 h1 r270
  text "+" at 57.5,38.004 h1.52 r90
  text "OUT" at 2.754,36.996 h1 r270
  text "OUT" at 57.246,34.754 h1 r90
  text "+" at 2.5,33.746 h1.52 r270
  text "QTR-1A" at 59.004,33.501 h1 r90
  text "-" at 57.246,32.754 h1 r90
  text "M1" at 2.754,27.246 h1 r270
  text "DRV8833" at 27.504,26.504 h0.8
  text "EB" at 57.246,25.754 h1 r90
  text "M2" at 2.754,24.746 h1 r270
  text "MOTOR L" at 0.996,23.332 h1 r270
  text "EA" at 57.246,23.004 h1 r90
  text "+" at 2.5,21.746 h1.52 r270
  text "-" at 57.508,20.754 h1.52 r90
  text "-" at 2.492,19.246 h1.52 r270
  text "+" at 57.5,18.254 h1.52 r90
  text "EA" at 2.754,16.996 h1 r270
  text "MOTOR R" at 59.004,16.668 h1 r90
  text "M1" at 57.246,15.504 h1 r90
  text "VBAT" at 34.379,14.629 h1
  text "5V" at 10.304,14.479 h1
  text "EB" at 2.754,14.246 h1 r270
  text "M2" at 57.246,12.754 h1 r90
  text "POWER" at 40.129,9.204 h1
  text "-" at 34.354,4.529 h1
  text "-" at 10.554,4.504 h1
  text "-" at 48.329,4.454 h3
  text "+" at 35.454,4.354 h3
Bottom Overlay:
  text "MADE BY" at 27.95,9.625 h1.5
  text "COSTEL" at 25.975,7.325 h1.5
Top Solder:
  text "ZEM" at 5.8,88.1 h2
  text "UNSTPB" at 46.3,87.4 h1.8
  text "MECATRONICA" at 46.179,85.454 h1
  text "2026" at 4.8,85.4 h2
Mechanical 1:
  the board outline again, w0.254

## Text inside footprints (layer, text, board x,y; h text height)
U1: Top 3D Body "J1" at 20,90.75 h1.27; Top 3D Body "J3" at 38.25,90.75 h1.27